# Altium PCB PCB2.PcbDoc
Units mm, origin at the board's own origin, x right, y up, seen from the top; angles counter-clockwise.
Board outline 74.55 x 54.36 mm, 4 copper layers (L-TOP, L-GND, L-Signal, L-BOT), stack 1.095 mm thick; 51 components, 37 nets, 176 pads, 102 vias.
Unrouted connection lines stored in the file: 1.
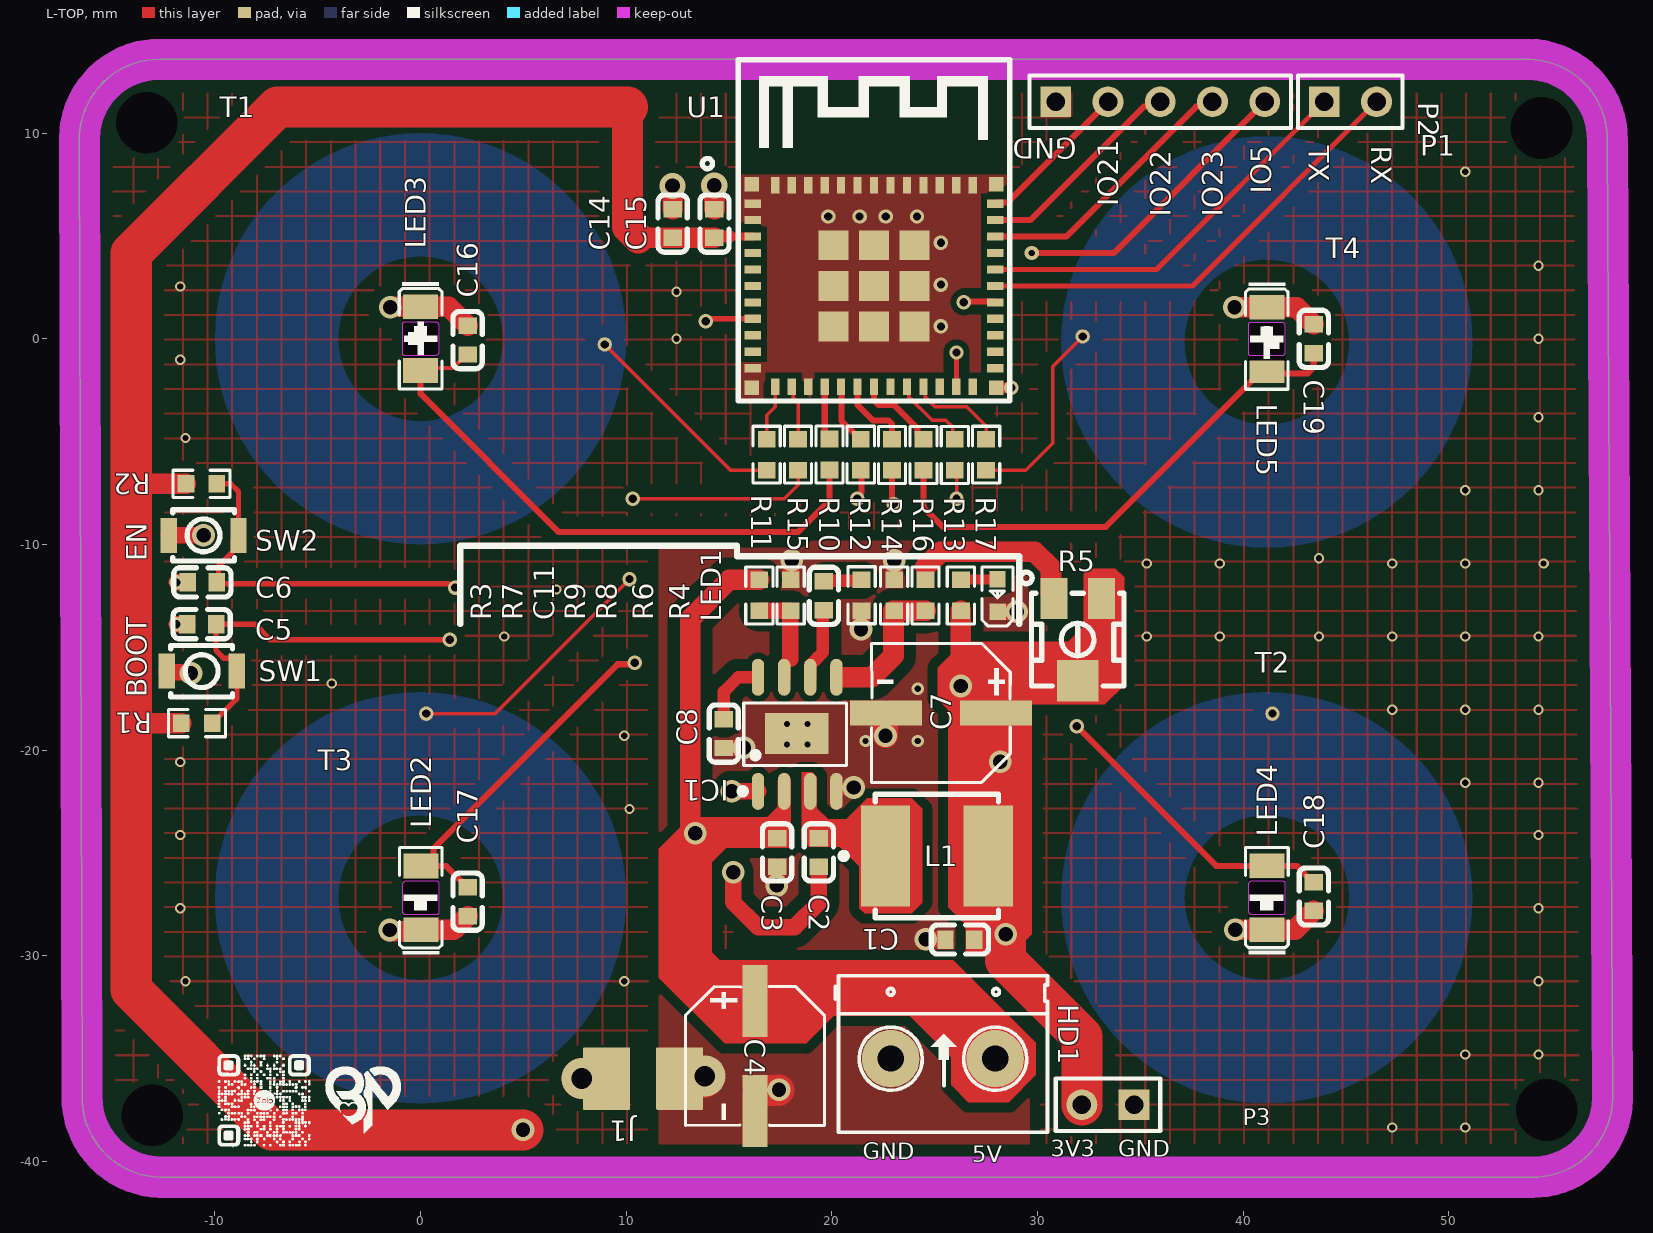
[diagram p0: L-TOP view]
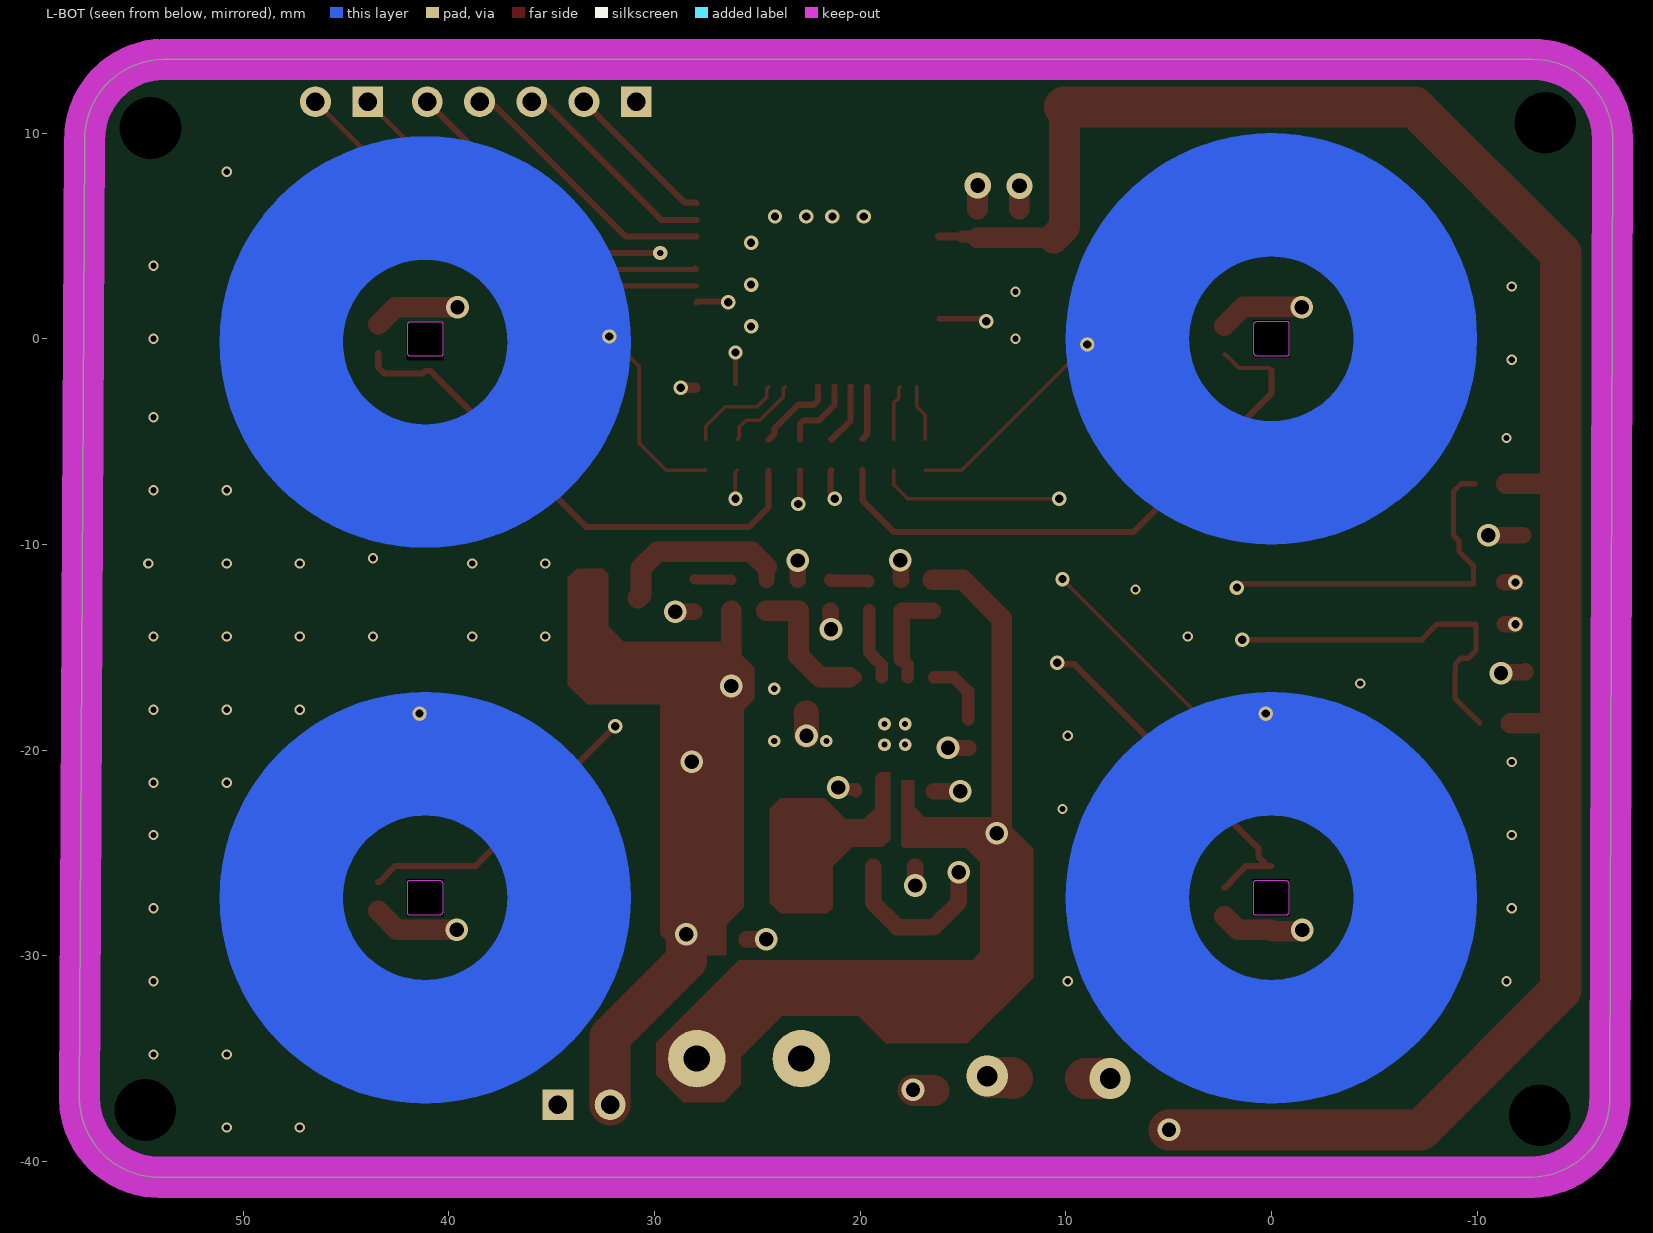
[diagram p1: L-BOT view, seen from below]
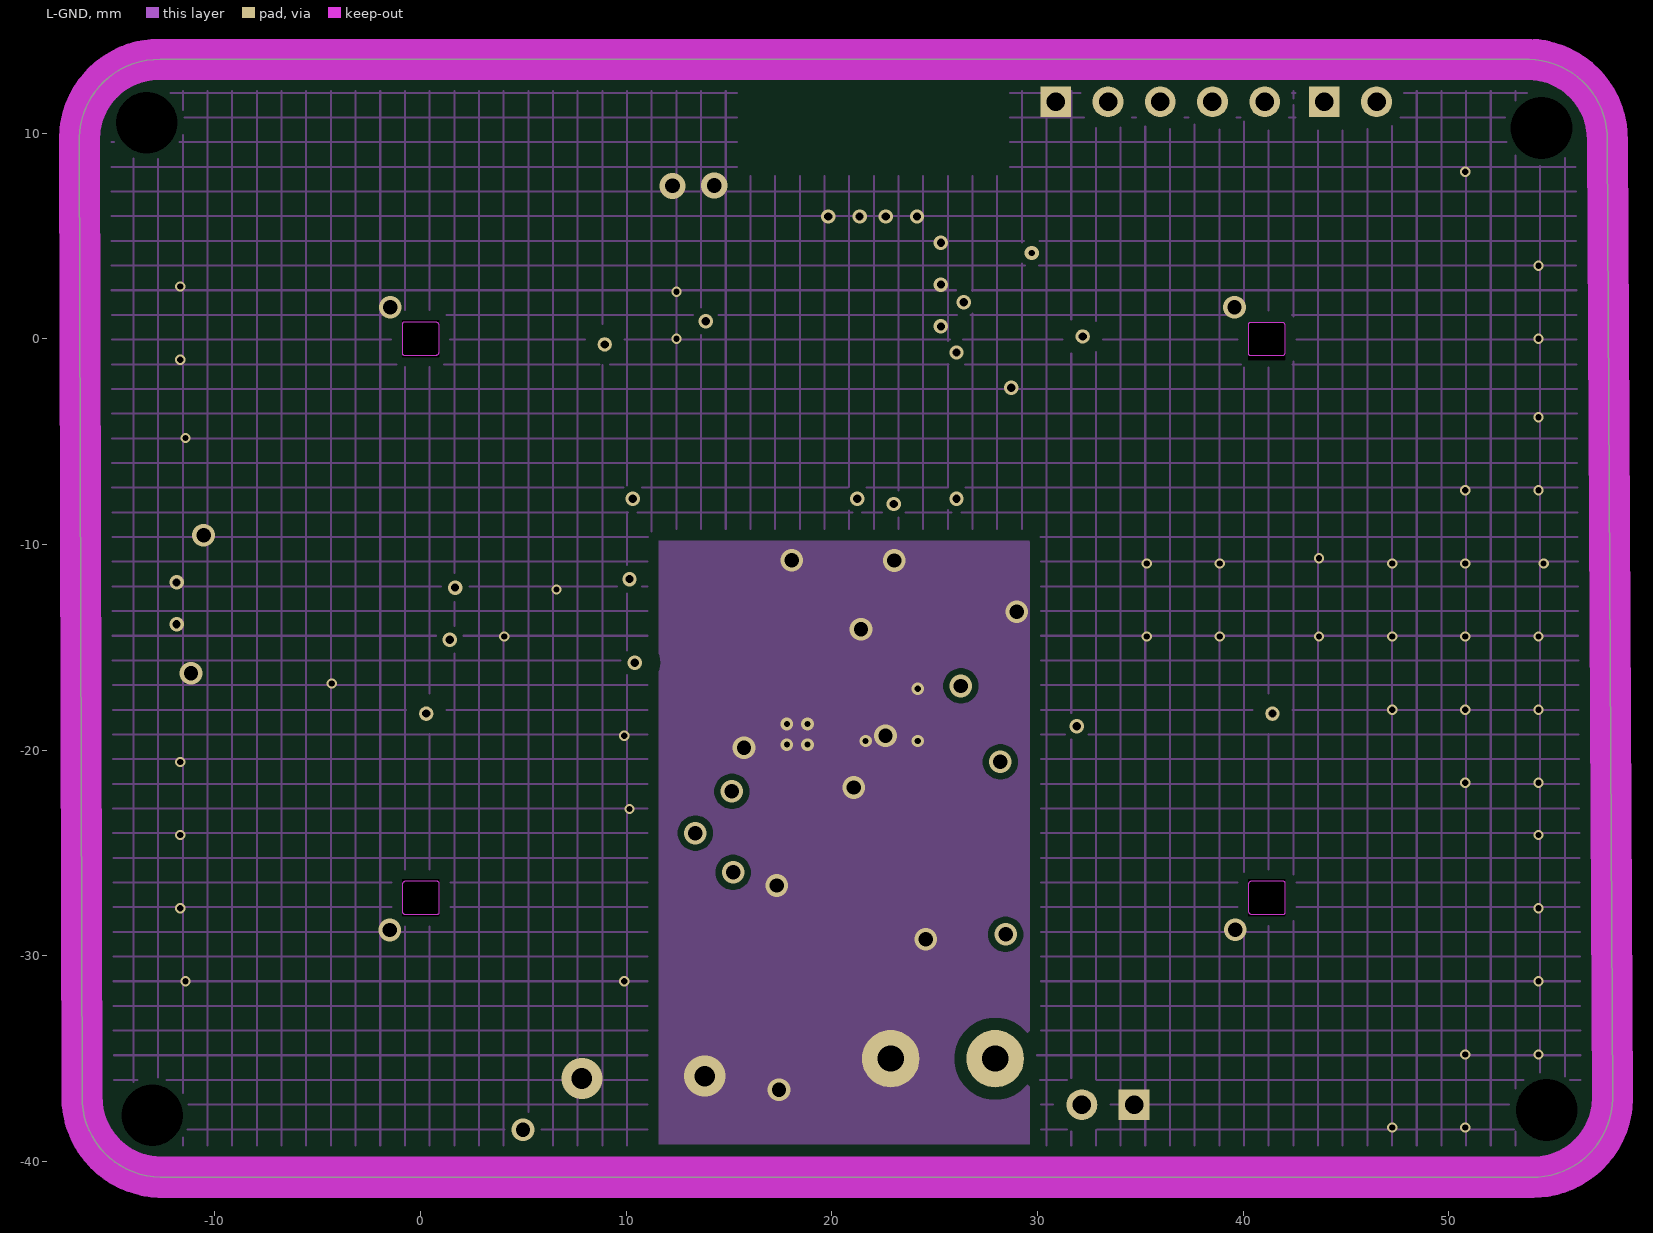
[diagram p2: L-GND]
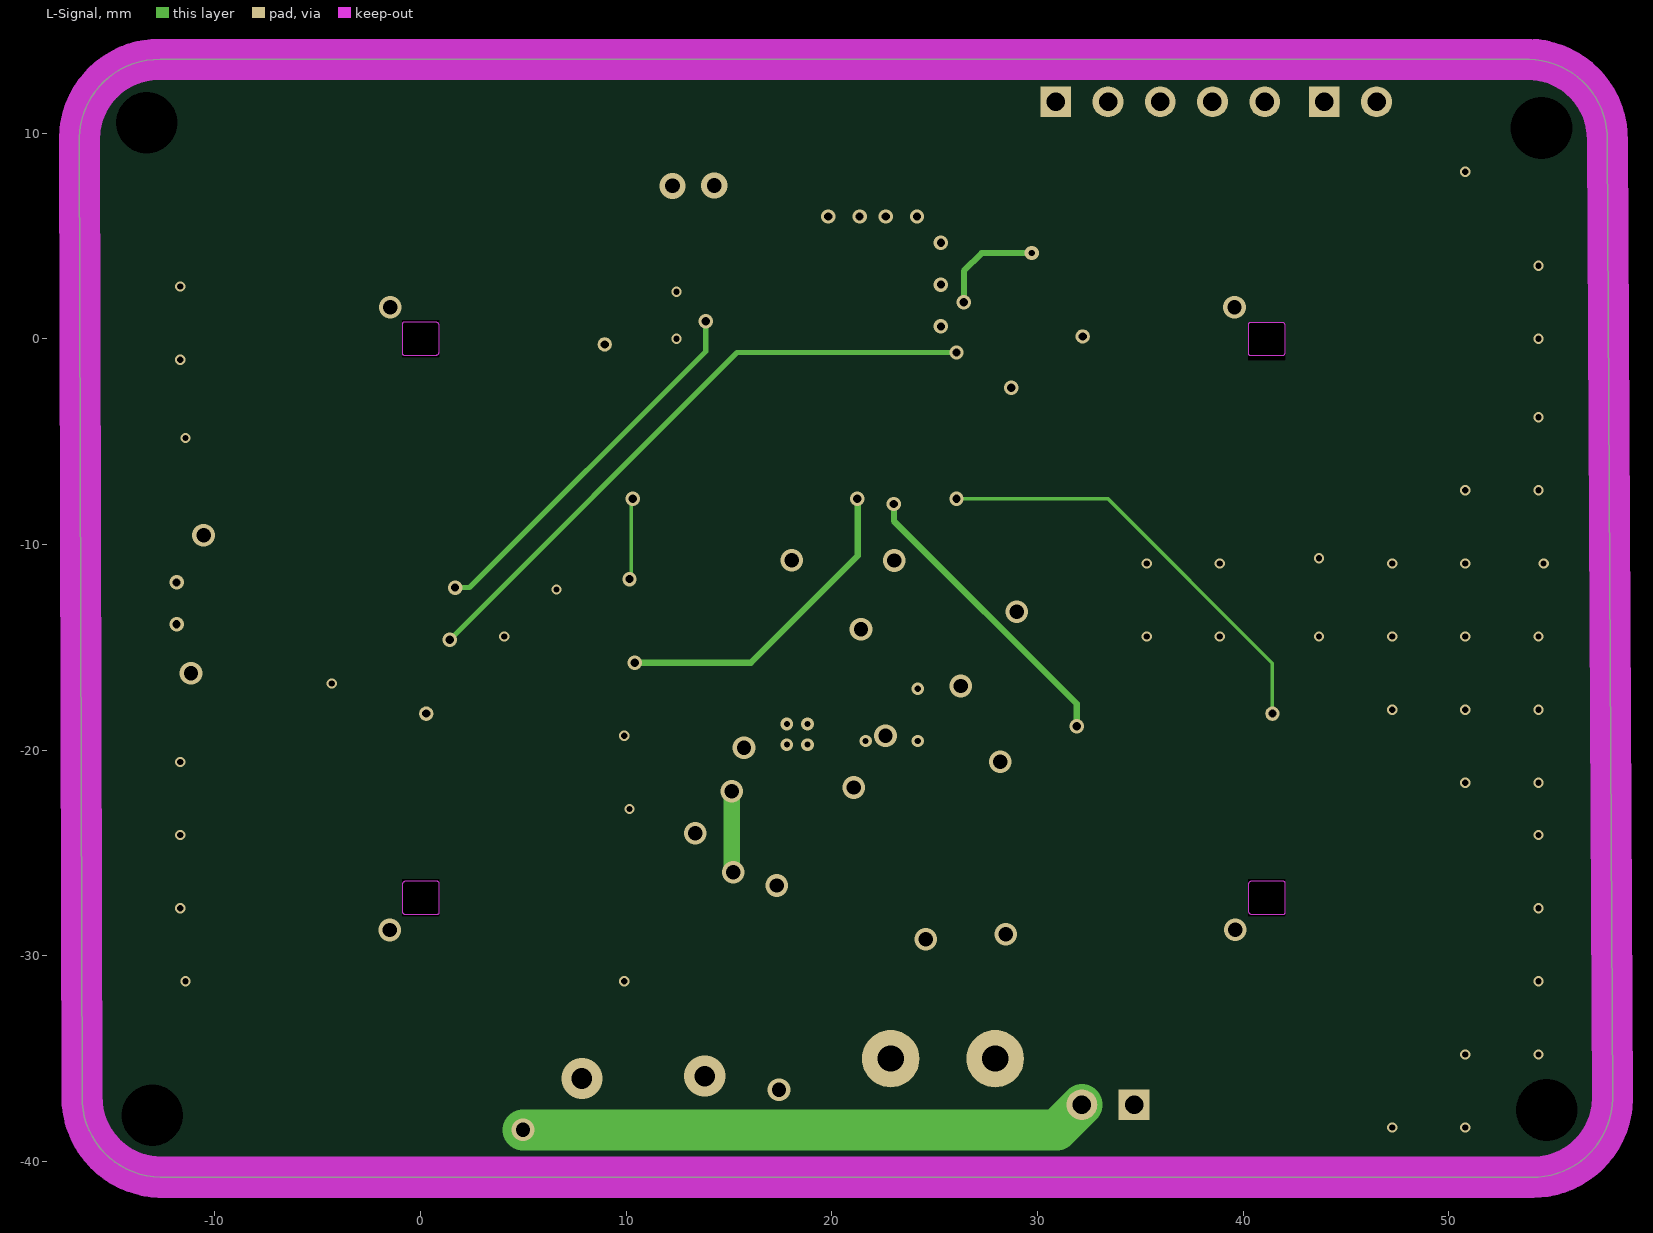
[diagram p3: L-Signal]
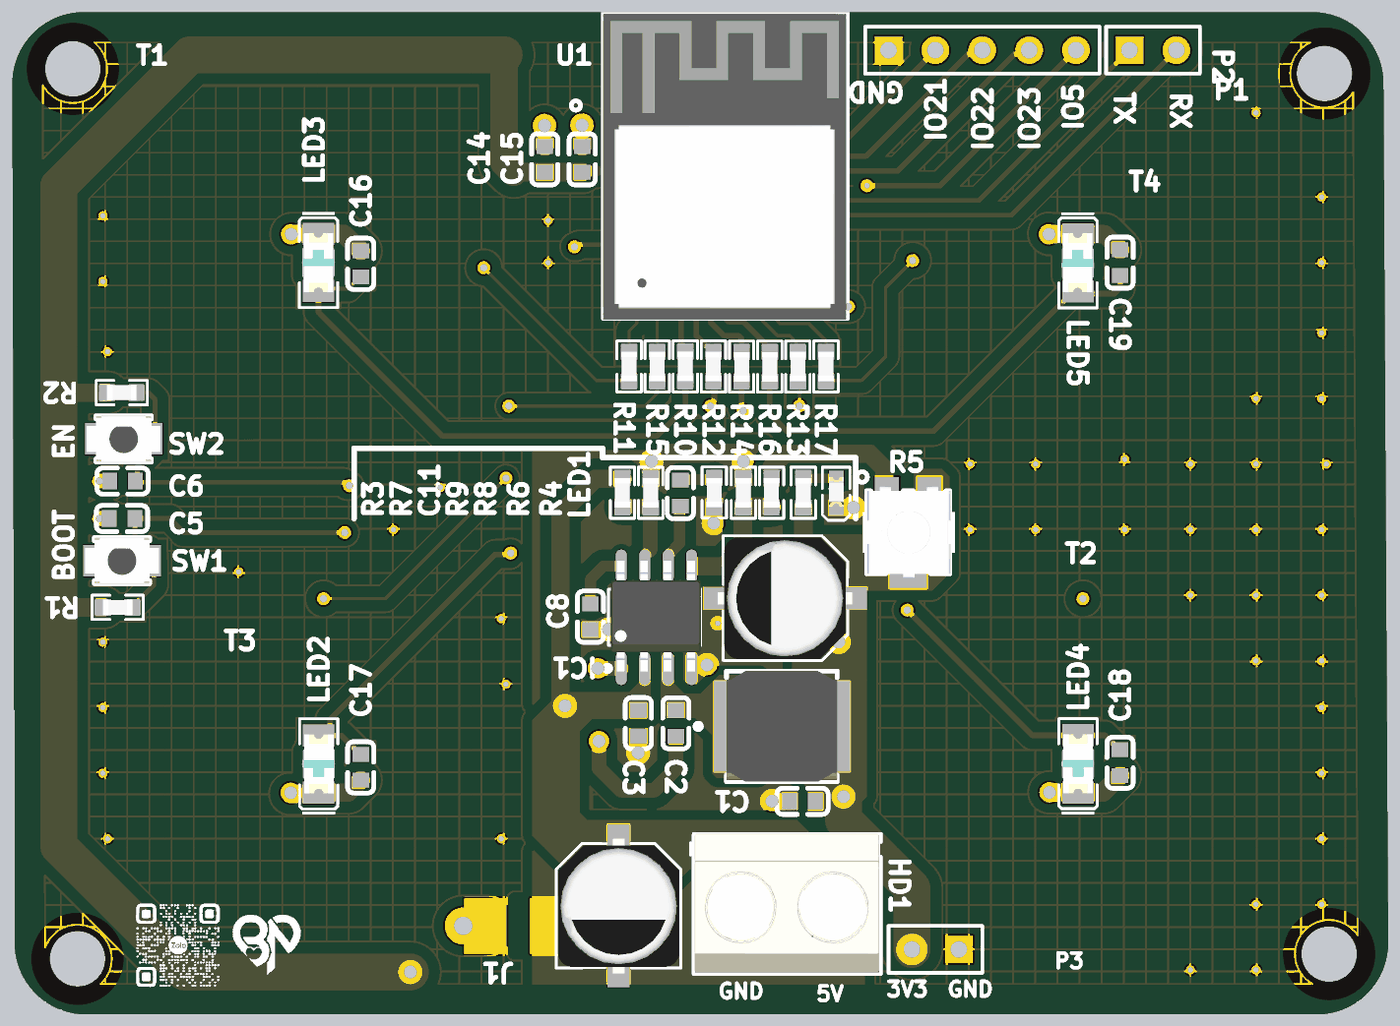
[diagram p4: 3D render of the assembled board from above, using the file's embedded part models]

## Layer stack, top to bottom
Top Solder: solder mask 0.0102, Solder Resist, Dk 3.5
L-TOP: signal copper 0.035
Dielectric 1: core 0.2286, Core-027, Dk 4.5
L-GND: signal copper 0.035
Dielectric 3: prepreg 0.2184, PP-023, Dk 4.5
L-Signal: signal copper 0.035
Dielectric 2: core 0.508, Core-036, Dk 4.6
L-BOT: signal copper 0.035
Bottom Solder: solder mask 0.0102, Solder Resist, Dk 3.5

## Board outline
-16.462,-36.83 -16.589,9.779 cw(c-12.716,9.715) -12.652,13.589 53.896,13.589 cw(c53.832,9.715) 57.706,9.652 57.96,-36.957 cw(c54.086,-36.894) 54.023,-40.767 -12.652,-40.767 cw(c-12.589,-36.894)

## Design rules (kind name [scope] priority, off if disabled: settings)
Clearance [All] p1: gap=0.3 ignorepadtopadclearanceinfootprint=TRUE except(0.5: Fill-Fill Fill-Poly Fill-Region Poly-Poly Poly-Region Region-Region; 0.6: Arc-Fill Arc-Poly Arc-Region Track-Fill Track-Poly Track-Region THPad-Fill THPad-Poly THPad-Region)
PolygonConnect PolygonConnect_1 [All] p1: connectstyle=Direct reliefconductorwidth=0.254 reliefentries=4 polygonreliefangle="90 Angle" airgapwidth=0.254
PolygonConnect [All] p2: connectstyle=Relief reliefconductorwidth=1 reliefentries=4 polygonreliefangle="90 Angle" airgapwidth=0.5
RoutingVias RoutingVias_Power [All] p1: holewidth=0.7 width=1.1 viastyle="Through Hole" minholewidth=0.7 minwidth=1.1 maxholewidth=0.7 maxwidth=1.1
RoutingVias RoutingVias_Signal [All] p2: holewidth=0.4 width=0.7 viastyle="Through Hole" minholewidth=0.4 minwidth=0.7 maxholewidth=0.4 maxwidth=0.7
SolderMaskExpansion [All] p1: expansion=0.102 istentingtop=FALSE
SupplyNets "Schematic Supply Nets_5" [InNet('PGND')] p1: voltage=0.000
SupplyNets "Schematic Supply Nets_4" [InNet('5V')] p2: voltage=0.000
SupplyNets "Schematic Supply Nets_1" [InNet('GND')] p3: voltage=0.000
SupplyNets "Schematic Supply Nets" [InNet('3V3')] p4: voltage=0.000
Width Width_Power [InNetClass('Power')] p1: maxlimit=2 minlimit=0.1 preferedwidth=1.5
Width Width_Signal [All] p2: maxlimit=1.5 minlimit=0.1 preferedwidth=0.3
30 further rules are at their usual default settings.

## Components (designator, comment, footprint, x,y, rotation, side; value= is the part's Value field where it differs from the comment)
C1 "22uF" C0603 26.224,-29.21 r0 top
C2 "100nF" C0603 19.365,-24.975 r270 top
C3 "10uF" C0603 17.333,-24.975 r90 top
C4 "220uF" CAP-SMD_BD6.3-L6.6-W6.6-FD 16.257,-34.874 r270 top
C5 "100nF" C0603 -10.646,-13.875 r180 top
C6 "100nF" C0603 -10.616,-11.843 r180 top
C7 "10uF" CAP-SMD_BD6.3-L6.6-W6.6-FD 25.298,-18.193 r180 top
C8 "100nF" C0603 14.741,-19.197 r90 top
C11 "6.8uF" C0603 19.61,-12.495 r270 top
C14 "22uF" C0603 12.259,5.605 r270 top
C15 "100nF" C0603 14.29,5.605 r90 top
C16 "1nF" C0603 2.286,-0.062 r90 top
C17 "1nF" C0603 2.286,-27.37 r270 top
C18 "1nF" C0603 43.434,-27.116 r270 top
C19 "1nF" C0603 43.434,0 r90 top
HD1 "Header 2" HED2 22.86,-35.004 r0 top
IC1 "MP1484" SOP-8_L4.9-W3.9-P1.27-LS6.0-BL-EP3.1 18.214,-19.23 r0 top
J1 "2 way net tie junction" 2way_HP 10.82,-35.973 r0 top net-tie
L1 "10uH" IND-SMD_L6.0-W6.0_VLS6045EX-2R0N 22.606,-25.146 r0 top
LED1 "XL-1608SURC-06" LED0603-RD_RED 28.05,-12.529 r90 top
LED2 "LTST-C250KFKT" LED1206_LTST-C230KRKT 0.01,-27.293 r90 top
LED3 "LTST-C250KFKT" LED1206_LTST-C230KRKT 0.001,0.115 r270 top
LED4 "LTST-C250KFKT" LED1206_LTST-C230KRKT 41.151,-27.287 r90 top
LED5 "LTST-C250KFKT" LED1206_LTST-C230KRKT 41.148,0.099 r270 top
P1 "Header 5" HDR1X5 30.886,11.525 r0 top
P2 "Header 2" HDR1X2 43.942,11.525 r0 top
P3 "Header 2" HDR1X2 34.696,-37.243 r180 top
R1 "10kΩ" R0603 -10.878,-18.692 r180 top
R2 "10kΩ" R0603 -10.656,-7.05 r180 top
R3 "50kΩ" R0603 16.471,-12.476 r90 top
R4 "50Ω" R0603 26.271,-12.476 r270 top
R5 "1kΩ" RES-ADJ-SMD_3P-L4.5-W4.5-P2.30-BL-FS 31.954,-14.625 r180 top
R6 "26.1kΩ" R0603 24.551,-12.476 r90 top
R7 "100kΩ" R0603 17.995,-12.476 r270 top
R8 "10kΩ" R0603 23.027,-12.476 r270 top
R9 "6.8kΩ" R0603 21.444,-12.471 r90 top
R10 "100Ω" R0603 19.879,-5.625 r270 top
R11 "1kΩ" R0603 16.831,-5.633 r90 top
R12 "100Ω" R0603 21.403,-5.633 r270 top
R13 "1kΩ" R0603 25.975,-5.642 r90 top
R14 "100Ω" R0603 22.927,-5.642 r270 top
R15 "1kΩ" R0603 18.355,-5.633 r90 top
R16 "100Ω" R0603 24.451,-5.642 r270 top
R17 "1kΩ" R0603 27.499,-5.633 r90 top
SW1 "B3U-1000P" KEY-SMD_B3U-1000PM -10.646,-16.161 r0 top
SW2 "B3U-1000P" KEY-SMD_B3U-1000PM -10.554,-9.557 r0 top
T1 "TouchPad" TouchPad 0,0 r0 top
T2 "TouchPad" TouchPad 41.148,-27.178 r90 top
T3 "TouchPad" TouchPad 0,-27.178 r90 top
T4 "TouchPad" TouchPad 41.148,-0.159 r180 top
U1 "ESP32-PICO-MINI-02-N8R2" BULETM-SMD_ESP32-PICO-MINI-02-N8R2 22.048,2.573 r0 top

## Footprints (in the part's own frame and the unit in brackets; to place one, negate y for a bottom-side part, rotate by r counter-clockwise, add the part's x,y. Pads: shape width x height; smd on the part's side, far side on the other; paste and mask are expansions set on the pad)
2way_HP [mil] "2 way high power power net tie junction"
  rrect5% 90x120 smd paste-100: 1(-70,0) 2(70,0)
BULETM-SMD_ESP32-PICO-MINI-02-N8R2 [mm] "BULETM-SMD_ESP32-PICO-MINI-02-N8R2"
  rect 0.8x0.4 smd paste+0 mask+0.05: 1(-5.9,4) 2(-5.9,3.2) 3(-5.9,2.4) 4(-5.9,1.6) 5(-5.9,0.8) 6(-5.9,0) 7(-5.9,-0.8) 8(-5.9,-1.6) 9(-5.9,-2.4) 10(-5.9,-3.2) 11(-5.9,-4) 25(5.9,-4) 26(5.9,-3.2) 27(5.9,-2.4) 28(5.9,-1.6) 29(5.9,-0.8) 30(5.9,0) 31(5.9,0.8) 32(5.9,1.6) 33(5.9,2.4) 34(5.9,3.2) 35(5.9,4)
  rect 0.4x0.8 smd paste+0 mask+0.05: 12(-4.8,-4.9) 13(-4,-4.9) 14(-3.2,-4.9) 15(-2.4,-4.9) 16(-1.6,-4.9) 17(-0.8,-4.9) 18(0,-4.9) 19(0.8,-4.9) 20(1.6,-4.9) 21(2.4,-4.9) 22(3.2,-4.9) 23(4,-4.9) 24(4.8,-4.9) 36(4.8,4.9) 37(4,4.9) 38(3.2,4.9) 39(2.4,4.9) 40(1.6,4.9) 41(0.8,4.9) 42(0,4.9) 43(-0.8,4.9) 44(-1.6,4.9) 45(-2.4,4.9) 46(-3.2,4.9) 47(-4,4.9) 48(-4.8,4.9)
  rect 1.45x1.45 smd paste+0 mask+0.05: 49(-1.975,-1.975) 49(-1.975,0) 49(-1.975,1.975) 49(0,-1.975) 49(0,0) 49(0,1.975) 49(1.975,-1.975) 49(1.975,0) 49(1.975,1.975)
  rect 0.7x0.7 smd paste+0 mask+0.05: 50(5.95,4.95) 51(5.95,-4.95) 52(-5.95,-4.95) 53(-5.95,4.95)
  silkscreen extent -8.35,-5.6 6.6,11, body extent -6.64,-5.67 6.56,10.93, height 2.55
C0603 [mm] "cap 0603"
  rect 0.8x0.9 smd paste+0 mask+0.051: 1(-0.7,0) 2(0.7,0)
  silkscreen extent -1.39,-0.71 1.39,0.71, body extent -0.81,-0.4 0.79,0.4, height 0.8
CAP-SMD_BD6.3-L6.6-W6.6-FD [mm] "CAP ALUM 220uF ±20% 10V SMD"
  rect 3.5x1.2 smd paste+0 mask+0.051: 1(-2.67,0) 2(2.67,0)
  silkscreen extent -3.38,-3.38 3.38,3.38, body extent -3.63,-3.29 3.67,3.31, height 5.8
HDR1X2 [mm] "Connector; Header; 2 Position"
  rect 1.5x1.5 hole 0.9: 1(0,0)
  round 1.5 hole 0.9: 2(2.54,0)
  silkscreen extent -1.27,-1.27 3.81,1.27, body extent -1.27,-1.27 3.81,1.27, height 7
HDR1X5 [mm] "Connector; Header; 5 Position"
  rect 1.5x1.5 hole 0.9: 1(0,0)
  round 1.5 hole 0.9: 2(2.54,0) 3(5.08,0) 4(7.62,0) 5(10.16,0)
  silkscreen extent -1.27,-1.27 11.43,1.27, body extent -1.27,-1.27 11.43,1.27, height 7
HED2 [mil] "Header 2, 2 pin, hight 300mil, Pin to Pin 200, Colour Green"
  round 110 hole 50: 1(0,0) 2(200,0)
  silkscreen extent -106,-141 300,159, body extent -98,-136 296,159, height 394
IND-SMD_L6.0-W6.0_VLS6045EX-2R0N [mm]
  rect 2.4x4.9 smd paste+0 mask+0.051: 1(0,0) 2(5,0)
  silkscreen extent -2.18,-3 5.5,3, body extent -0.5,-3 5.5,3, height 4.5
KEY-SMD_B3U-1000PM [mm]
  rect 0.8x1.7 smd paste+0 mask+0.051: 1(-1.7,0) 2(1.7,0)
  silkscreen extent -1.5,-1.25 1.5,1.25, body extent -2,-1.25 2,1.25, height 1.75
LED0603-RD_RED [mm] "LED RED"
  rect 0.8x0.8 smd paste+0 mask+0.051: 1(-0.75,-0.009) 2(0.849,-0.002)
  silkscreen extent -1.44,-0.75 1.44,0.75, body extent -0.7,-0.4 0.9,0.4, height 0.7
LED1206_LTST-C230KRKT [mm]
  rect 1.2x1.7 smd paste+0 mask+0.05: 1(1.658,0) 2(-1.442,0)
  Keep-Out Layer board cut-out: -0.617,-0.875 -0.655,-0.867 -0.688,-0.846 -0.71,-0.813 -0.717,-0.775 -0.717,-0.775 -0.717,0.725 -0.706,0.782 -0.673,0.831 -0.625,0.864 -0.567,0.875 -0.567,0.875 0.783,0.875 0.84,0.864 0.889,0.831 0.921,0.782 0.933,0.725 0.933,0.725 0.933,-0.775 0.925,-0.813 0.904,-0.846 0.871,-0.867 0.833,-0.875 0.833,-0.875
  silkscreen extent -2.63,-1.04 2.55,1.04, body extent -1.49,-0.81 1.71,0.79, height 0.28
R0603 [mm] "Resister pakage 0603"
  rect 0.806x0.864 smd paste-100 mask+0.051: 1(-0.753,0) 2(0.753,0)
  silkscreen extent -1.39,-0.66 1.39,0.66, body extent -0.8,-0.43 0.8,0.43, height 0.48
RES-ADJ-SMD_3P-L4.5-W4.5-P2.30-BL-FS [mm]
  rect 1.3x2 smd mask+0.1: 1(1.15,-2) 3(-1.15,-2)
  rect 2x2 smd mask+0.1: 2(0,2)
  silkscreen extent -2.25,-3.28 2.78,2.25, body extent -2.54,-2.5 2.46,2.5
SOP-8_L4.9-W3.9-P1.27-LS6.0-BL-EP3.1 [mm] "MP1484"
  oval 0.6x1.8 smd paste+0 mask+0.051: 1(-1.805,-2.773) 2(-0.535,-2.773) 3(0.735,-2.773) 4(2.005,-2.773) 5(2.005,2.773) 6(0.735,2.773) 7(-0.535,2.773) 8(-1.805,2.773)
  rect 3.1x2 smd paste+0 mask+0.051: 9(0.083,0.033)
  silkscreen extent -2.7,-2.92 2.5,1.52, body extent -2.38,-2.94 2.52,3.06, height 1.7
TouchPad [mm]
  round 0.7 hole 0.4: 1(8.953,-0.273)
  rect 0x0 hole 1.79 square unplated mask+0: 3(0,0)
  L-BOT circle w6: c0,0 r7
  silkscreen extent -0.6,-0.78 0.15,0.82

## Part data
C1 C14: library part CL10A226MP8NUNE, "10V 22uF X5R ±20% 0603 Ceramic Capacitors ROHS"
C2 C5 C6 C8 C15: library part CC0603KRX7R9BB104, "50V 100nF X7R ±10% 0603 Ceramic Capacitors ROHS"
C3: library part CL10A106KP8NNNC, "10V 10uF X5R ±10% 0603 Ceramic Capacitors ROHS"
C4: library part RVT220UF10V67RV0037, "220uF 10V ±20% 69mA@120Hz SMD,D6.3xL5.4mm Aluminum Electrolytic Capacitors ROHS"
C7: library part RST10UF50V016, "10uF 50V 24mA@120Hz ±20% SMD,D5xL5.4mm Aluminum Electrolytic Capacitors ROHS"
C11: library part C1608X5R1A685KT000E, "10V 6.8uF X5R ±10% 0603 Ceramic Capacitors ROHS"
C16 C17 C18 C19: library part CL10B102KB8NNNC, "50V 1nF X7R ±10% 0603 Ceramic Capacitors ROHS"
HD1: library part Hed2, "Header 2 (Green)"
IC1: "The MP1484 is a monolithic synchronous buck  / regulator."
J1: library part 2way, ComponentLink1Description=Source, ComponentLink1URL=http://www.edatools.cz/addons, FootprintNote="LP=12mil, MP=40mil, HP=120mil"
L1: library part VLS6045EX-100M, "3.4A 10uH ±20% 3.9A 47mΩ SMD,6x6mm Fixed Inductors ROHS"
LED2 LED3 LED4 LED5: "20mA Orange 1.6V~2.4V 62.5mW 1205 LED Indication - Discrete ROHS"
P1: "Header, 5-Pin", LatestRevisionDate=17-Jul-2002, LatestRevisionNote="Re-released for DXP Platform.", Publisher="Altium Limited", System=Connector
P2 P3: "Header, 2-Pin", LatestRevisionDate=17-Jul-2002, LatestRevisionNote="Re-released for DXP Platform.", Publisher="Altium Limited"
R1 R2 R8: library part RC0603FR-0710KL, "100mW 10kΩ 75V ±100ppm/℃ Thick Film Resistor ±1% 0603 Chip Resistor - Surface Mount ROHS"
R3: library part RT0603BRD0750KL, "50kΩ 100mW 75V ±25ppm/℃ Thin Film Resistor ±0.1% 0603 Chip Resistor - Surface Mount ROHS"
R4: library part RT0603BRE0750RL, "100mW 50Ω 75V ±50ppm/℃ Thin Film Resistor ±0.1% 0603 Chip Resistor - Surface Mount ROHS"
R5: library part 3314J-1-102E, "±20% ±100ppm/℃ 250mW 1kΩ SMD,4.5x4.5mm Trimmer Potentiometers ROHS"
R6: library part 0603WAF2612T5E, "100mW 26.1kΩ 75V ±100ppm/℃ Thick Film Resistor ±1% 0603 Chip Resistor - Surface Mount ROHS"
R7: library part RC0603FR-07100KL, "100mW 100kΩ 75V ±100ppm/℃ Thick Film Resistor ±1% 0603 Chip Resistor - Surface Mount ROHS"
R9: library part FRC0603F6801TS, "6.8kΩ 100mW 75V ±100ppm/℃ Thick Film Resistor ±1% 0603 Chip Resistor - Surface Mount ROHS"
R10 R12 R14 R16: library part RC0603FR-07100RL, "100mW 100Ω 75V ±100ppm/℃ Thick Film Resistor ±1% 0603 Chip Resistor - Surface Mount ROHS"
R11 R13 R15 R17: library part "RMC 0603 1K J N", "100mW 1kΩ 50V ±100ppm/℃ Thick Film Resistor ±5% 0603 Chip Resistor - Surface Mount ROHS"
SW1 SW2: "12V 2.5mm Round Button 3mm SPST 50mA SMD,3x2.5mm Tactile Switches ROHS"
T1 T2 T3 T4: "pad cam ung dien dung"
U1: "ESP32-PICO-MINI-02 and ESP32-PICO-MINI-02U are two general-purpose Wi-Fi + Bluetooth + Bluetooth LEMCU modules"

## Free pads (board coordinates)
  round 0 hole 3 unplated mask+2.5: 4(-13.31,10.509) 4(-13.056,-37.751) 4(54.508,10.255) 4(54.762,-37.497)

## Via types
v1: diameter 0.5, hole 0.3, L-TOP to L-BOT, 45 vias
v2: diameter 1.1, hole 0.7, L-TOP to L-BOT, 23 vias
v3: diameter 0.7, hole 0.4, L-TOP to L-BOT, 22 vias
v4: diameter 0.61, hole 0.305, L-TOP to L-BOT, 4 vias
v5: diameter 0.6, hole 0.3, L-TOP to L-BOT, 3 vias
v6: diameter 2, hole 1, L-TOP to L-BOT, 2 vias
v7: diameter 1.27, hole 0.711, L-TOP to L-BOT, 2 vias
v8: diameter 0.7, hole 0.3, L-TOP to L-BOT, 1 vias

## Nets (pads, with @x,y where several pads share a name; then routed paths per layer and width w, separated by ;. In a path a pad name is that pad's centre, name@x,y a point inside that pad or via, vN(x,y) a via of type N, cw(c..) or ccw(c..) an arc to the next point about the centre after c; other vN are vias at no path point)
3V3: C1.2 C7.1 C14.2 C15.1 L1.2 P3.2 R1.2 R2.2 R4.2 R5.2 R5.3 U1.3 | length 143.5
  L-TOP w0.4: 15.048,4.973 U1.3
  L-TOP w0.6: C15.1 14.358,4.973 15.048,4.973
  L-TOP w1: -14.292,-7.096 -14.246,-7.05 -14.072,-7.05 R2.2 ; -14.116,-18.596 -14.072,-18.641 -14.02,-18.692 R1.2 ; 10.583,4.905 C15.1 ; v2(26.271,-16.88) R4.2
  L-TOP w1.5: 10.058,11.271 10.058,5.429 10.583,4.905
  L-TOP w2: -14.072,-18.641 -14.072,-31.655 -7.259,-38.467 v2(4.978,-38.467) ; -14.072,-18.596 -14.072,-7.05 -14.072,4.159 -6.96,11.271 10.058,11.271 ; v2(28.448,-28.956) 28.448,-30.226 32.156,-33.934 P3.2
  L-Signal w2: v2(4.978,-38.467) 30.932,-38.467 P3.2
  other v2: 28.194,-20.574
5V: C3.2 C4.1 HD1.2 IC1.2 R3.2 | length 17.1
  L-TOP w0.6: C3.2 17.383,-24.275 17.678,-23.98 IC1.2
  L-TOP w1: v2(13.36,-24.035) 13.36,-24.008 13.106,-23.754 13.106,-13.621 15.005,-11.722 R3.2
Boot: C5.1 R1.1 SW1.2 U1.23 | length 49.5
  L-TOP w0.254: R1.1 -10.125,-18.663 -9.849,-18.387 -9.82,-18.387 -8.927,-17.494 SW1.2@-8.927,-16.161 ; SW1.2 -8.945,-15.801 -9.218,-15.528 -9.578,-15.528 -9.946,-15.161 C5.1 -8.051,-13.875 -7.34,-14.586 ; -7.34,-14.637 v3(1.422,-14.637) ; U1.23@26.06,-2.164 v3(26.06,-0.667)
  L-Signal w0.254: v3(1.422,-14.637) 15.392,-0.667 v3(26.06,-0.667)
BS: C2.2 IC1.1 | length 13.6
  L-TOP w0.8: v2(15.138,-22.003) IC1.1 ; v2(15.196,-25.947) 15.196,-27.394 16.408,-28.607 18.186,-28.607 19.365,-27.428 C2.2
  L-Signal w0.8: v2(15.138,-22.003) 15.138,-25.89 v2(15.196,-25.947)
COMP: C11.2 IC1.6 | length 3.5
  L-TOP w0.6: IC1.6 18.948,-15.858 19.318,-15.488 19.318,-15.485 19.56,-15.243 C11.2@19.56,-13.195
EN: C6.1 R2.1 SW2.2 U1.8 | length 38.3
  L-TOP w0.254: R2.1 -9.228,-7.05 -8.854,-7.425 SW2.2 -9.127,-9.83 -9.127,-10.335 -9.834,-11.042 C6.1@-9.834,-11.76 ; C6.1@-9.849,-11.907 1.366,-11.907 1.556,-12.097 v3(1.676,-12.097) ; v3(13.868,0.857) 13.989,0.857 14.104,0.973 U1.8
  L-Signal w0.254: v3(1.676,-12.097) 2.381,-12.097 13.868,-0.61 v3(13.868,0.857)
EN1: IC1.7 R3.1 R7.2 | length 4.9
  L-TOP w0.6: IC1.7 17.678,-15.858 17.967,-15.569 ; R7.2@17.967,-13.229 R7.2
  L-TOP w0.8: R3.1 17.678,-13.229 R7.2@17.967,-13.229 ; 17.967,-15.569 R7.2@17.967,-13.232
FB: IC1.5 R6.1 R8.2 | length 7
  L-TOP w0.6: IC1.5 20.218,-16.466 20.536,-16.466
  L-TOP w1: 20.536,-16.466 21.945,-16.466 22.995,-15.416 22.995,-13.232 22.999,-13.229 R6.1
GND: C5.2 C6.2 C14.1 C15.2 C16.2 C17.2 C18.2 C19.2 J1.1 LED2.2 LED3.2 LED4.2 LED5.2 P1.1 P3.1 SW1.1 SW2.1 U1.1 U1.2 U1.11 U1.14 U1.36 U1.37 U1.38 U1.39 U1.40 U1.41 U1.42 U1.43 U1.44 U1.45 U1.46 U1.47 U1.48 U1.49 U1.50 U1.51 U1.52 U1.53 | length 24.9
  L-TOP w0.5: U1.51 28.002,-2.381 28.715,-2.381 v3(28.718,-2.384)
  L-TOP w0.8: SW1.1 -12.346,-16.214 -11.215,-16.214 v2(-11.162,-16.267) ; SW2.1 v2(-10.554,-9.557) ; v3(-11.864,-13.875) C5.2 ; v3(-11.864,-11.843) C6.2
  L-TOP w1: v2@-1.525,-28.804 -0.058,-28.804 LED2.2 1.62,-28.735 C17.2 ; v2@-1.469,1.548 -1.459,1.558 LED3.2 1.366,1.558 C16.2 ; v7(12.251,7.436) 12.259,7.428 C14.1 ; v7(14.277,7.454) 14.291,7.441 C15.2 ; v2@39.591,1.576 39.624,1.543 41.146,1.543 LED5.2 42.593,1.541 C19.2 ; v2@39.601,-28.721 39.61,-28.73 LED4.2 42.52,-28.73 C18.2
  L-TOP w2: v6(7.844,-35.967) 7.849,-35.973 J1.1
  other v1: 47.244,-38.354 50.8,-38.354 50.8,-34.798 54.356,-34.798 -11.43,-31.242 9.906,-31.242 54.356,-31.242 -11.684,-27.686 54.356,-27.686 -11.684,-24.13 54.356,-24.13 10.16,-22.86 50.8,-21.59 54.356,-21.59 -11.684,-20.574 9.906,-19.304 47.244,-18.034 50.8,-18.034 54.356,-18.034 -4.318,-16.764 4.064,-14.478 35.306,-14.478 38.862,-14.478 43.688,-14.478 47.244,-14.478 50.8,-14.478 54.356,-14.478 6.604,-12.192 35.306,-10.922 38.862,-10.922 47.244,-10.922 50.8,-10.922 54.61,-10.922 43.688,-10.668 50.8,-7.366 54.356,-7.366 -11.43,-4.826 54.356,-3.81 -11.684,-1.016 12.446,0 54.356,0 12.446,2.286 -11.684,2.54 54.356,3.556 50.8,8.128
  other v2: -1.503,-28.748 39.612,-28.727 -1.477,1.54 39.577,1.541
  other v3: 25.298,0.603 25.298,2.635 25.298,4.667 19.821,5.949 21.345,5.949 22.615,5.949 24.139,5.949
IO5: P1.5 U1.29 | length 21.1
  L-TOP w0.3: v3(26.416,1.778) 26.461,1.823 27.899,1.823 U1.29 ; v8(29.718,4.173) 33.694,4.173 P1.5
  L-Signal w0.3: v3(26.416,1.778) 26.416,3.302 27.287,4.173 v8(29.718,4.173)
IO14: R16.1 U1.18 | length 4
  L-TOP w0.3: U1.18 22.048,-3.005 22.25,-3.207 23.012,-3.207 24.169,-4.363 24.169,-4.636 24.422,-4.889 R16.1
IO21: P1.2 U1.35 | length 7.5
  L-TOP w0.3: U1.35 27.999,6.623 28.524,6.623 P1.2
IO22: P1.3 U1.34 | length 10.4
  L-TOP w0.3: U1.34 29.649,5.773 35.172,11.296 35.737,11.296 P1.3
IO23: P1.4 U1.33 | length 13.3
  L-TOP w0.3: U1.33 31.389,4.973 37.712,11.296 38.277,11.296 P1.4
IO25: R10.1 U1.15 | length 2.6
  L-TOP w0.3: U1.15 19.649,-4.641 R10.1
IO26: R12.1 U1.16 | length 3
  L-TOP w0.3: U1.16 20.466,-2.345 20.466,-3.972 21.374,-4.88 R12.1
IO27: R14.1 U1.17 | length 3.7
  L-TOP w0.3: U1.17 21.248,-3.221 21.996,-3.969 22.751,-3.969 22.927,-4.144 R14.1
NetC11_1: C11.1 R9.2 | length 1.9
  L-TOP w0.6: C11.1 19.649,-11.756 21.405,-11.756 R9.2
NetC16_1: C16.1 LED3.1 R10.2 | length 28.5
  L-TOP w0.2: LED3.1 0.126,-1.417 1.581,-1.417 2.236,-0.762 C16.1
  L-TOP w0.3: LED3.1 0.001,-2.68 6.719,-9.398 18.345,-9.398 19.879,-7.864 R10.2
NetC17_1: C17.1 LED2.1 R12.2 | length 34.6
  L-TOP w0.3: LED2.1 0.18,-25.635 0.63,-25.185 0.63,-24.77 9.575,-15.825 10.337,-15.825 v3(10.414,-15.748) ; LED2.1@0.131,-25.635 1.251,-25.635 1.986,-26.37 1.986,-26.42 2.236,-26.67 C17.1 ; v3(21.234,-7.779) 21.234,-7.67 21.445,-7.459 21.445,-6.429 R12.2
  L-Signal w0.3: v3(10.414,-15.748) 16.059,-15.748 21.259,-10.548 21.259,-7.803 v3(21.234,-7.779)
NetC18_1: C18.1 LED4.1 R14.2 | length 30.8
  L-TOP w0.3: R14.2 22.927,-7.839 23.012,-7.924 v3(23.012,-8.033) ; v3(31.902,-18.843) 38.689,-25.629 42.597,-25.629 43.384,-26.416 C18.1
  L-Signal w0.3: v3(23.012,-8.033) 23.012,-8.858 31.902,-17.748 v3(31.902,-18.843)
NetC19_1: C19.1 LED5.1 R16.2 | length 25.2
  L-TOP w0.3: R16.2 24.451,-8.195 25.4,-9.144 33.313,-9.144 40.898,-1.559 LED5.1 41.272,-1.683 43.141,-1.683 43.434,-1.39 C19.1
NetLED1_2: LED1.2 R4.1 | length 1.8
  L-TOP w0.5: R4.1 26.292,-11.701 28.03,-11.701 LED1.2
NetR5_1: R5.1 R6.2 | length 8.9
  L-TOP w0.8: R6.2 24.551,-11.09
  L-TOP w1: 24.551,-11.09 25.28,-10.362 29.87,-10.362 30.654,-11.146 30.654,-12.475 R5.1
NetR11_1: R11.1 T1.1 | length 10.4
  L-TOP w0.17: T1.1 15.067,-6.387 R11.1
NetR13_1: R13.1 T2.1 | length 22.5
  L-TOP w0.17: R13.1 26.06,-6.481 v3(26.06,-7.779)
  L-Signal w0.17: v3(26.06,-7.779) 33.426,-7.779 41.421,-15.774 T2.1
NetR15_1: R15.1 T3.1 | length 25.6
  L-TOP w0.17: T3.1 3.619,-18.225 v3(10.16,-11.684) ; v3(10.312,-7.779) 17.678,-7.779 18.355,-7.102 R15.1
  L-Signal w0.17: v3(10.16,-11.684) 10.236,-11.608 10.236,-7.855 v3(10.312,-7.779)
NetR17_1: R17.1 T4.1 | length 9.6
  L-TOP w0.17: R17.1 29.427,-6.387 30.734,-5.08 30.734,-1.346 T4.1
PGND: C1.1 C3.1 C4.2 C7.2 C8.1 HD1.1 IC1.4 IC1.9 J1.2 LED1.1 R7.1 R8.1 R9.1 | length 11.1
  L-TOP w0.6: IC1.4 20.218,-21.91 20.964,-21.91 v2(21.056,-21.818)
  L-TOP w0.8: C8.1 15.709,-19.897 v2(15.724,-19.882) ; v2(17.319,-26.583) 17.326,-26.577 17.326,-25.675 C3.1 ; R7.1 18.018,-11.722 18.021,-11.719 18.021,-10.795 v2(18.046,-10.77) ; v2(21.415,-14.129) 21.429,-14.114 21.429,-13.227 21.433,-13.224 R9.1 ; R8.1 v2@23.028,-10.779 ; v2(24.57,-29.198) 24.576,-29.204 25.524,-29.204 C1.1 ; LED1.1 28.992,-13.279 v2(28.993,-13.278)
  L-TOP w1.2: v2(22.606,-19.304) 22.606,-18.192 C7.2
  L-TOP w1.5: C4.2@16.406,-36.544 17.402,-36.544 v2(17.426,-36.52)
  L-TOP w2: J1.2 12.658,-35.913 13.76,-35.913 v6(13.819,-35.854)
  other v2: 23.028,-10.779
  other v4: 17.813,-19.73 18.813,-19.73 17.813,-18.73 18.813,-18.73
  other v5: 21.638,-19.558 24.178,-19.558 24.178,-17.018
RX: P2.2 U1.30 | length 22.2
  L-TOP w0.254: U1.30 37.529,2.573 P2.2
SS: C8.2 IC1.8 | length 3.3
  L-TOP w0.6: C8.2 14.741,-17.165 15.448,-16.458 IC1.8
SW: C2.1 IC1.3 L1.1
touch1: R11.2 U1.12 | length 2.7
  L-TOP w0.17: R11.2 16.831,-3.714 17.249,-3.296 U1.12
touch2: R15.2 U1.13 | length 2.7
  L-TOP w0.17: U1.13 18.118,-2.397 18.118,-2.878 18.355,-3.115 R15.2
touch3: R13.2 U1.20 | length 3.9
  L-TOP w0.17: U1.20 23.748,-2.427 23.748,-2.839 24.87,-3.961 25.544,-3.961 25.886,-4.303 25.886,-4.801 R13.2
touch4: R17.2 U1.21 | length 4.7
  L-TOP w0.17: U1.21 24.548,-2.427 24.548,-2.839 25.012,-3.302 26.552,-3.302 27.499,-4.248 R17.2
TX: P2.1 U1.31 | length 19.5
  L-TOP w0.254: U1.31@28.022,3.446 U1.31 35.789,3.373 P2.1
pads on no net: T1.3 T2.3 T3.3 T4.3 U1.4 U1.5 U1.6 U1.7 U1.9 U1.10 U1.19 U1.22 U1.24 U1.25 U1.26 U1.27 U1.28 U1.32

## Polygon pours and split planes (outlines as drawn)
GND on L-GND "GND_L02_P001" (hatched 90Degree grid 1.2 track 0.1, pour order 1): -16.589,13.682 -16.526,13.619 57.706,13.619 57.706,-40.494 57.413,-40.787 -16.247,-40.787 -16.589,-40.446 -16.589,13.589
PGND on L-GND "PGND_L02_P004" (solid, pour order 4): 11.582,-39.222 11.582,-9.811 29.616,-9.811 29.616,-39.222
GND on L-TOP "GND_L01_P003" (hatched 90Degree grid 1.2 track 0.1, pour order 3): -15.24,12.7 56.388,12.7 57.404,11.684 57.404,-38.862 55.372,-40.894 -13.462,-40.894 -16.51,-37.846 -16.51,11.43
PGND on L-TOP "PGND_L01_P000" (solid, pour order 0): 11.582,-39.222 11.582,-9.811 29.616,-9.811 29.616,-39.222
GND on L-TOP "GND_L01_P002" (solid, pour order 2): 15.392,7.969 28.6,7.969 28.6,-2.979 28.649,-3.027 15.448,-3.027 15.448,7.913

## Keep-outs
Keep-Out Layer:
  the board outline again, w2

## Other copper
L-TOP:
  pour cut-out: 15.448,7.913 15.505,7.969 28.6,7.969 28.6,13.524 28.649,13.573 15.448,13.573
  region net 5V: 14.546,-30.209 25.891,-30.209 29.923,-34.241 29.923,-35.796 28.592,-37.128 26.639,-37.128 25.793,-36.282 25.793,-34.944 23.774,-32.925 20.081,-32.925 18.739,-34.267 18.73,-34.258 14.78,-34.258 11.582,-31.06 11.582,-24.797 13.106,-23.273 16.85,-23.273 17.363,-22.76 17.363,-21.454 17.983,-21.454 17.992,-21.445 17.992,-24.639 17.884,-24.747 14.861,-24.747 14.159,-25.449 14.159,-29.822
  region net SW: 18.542,-21.082 18.542,-24.348 18.89,-24.696 20.378,-24.696 21.336,-25.654 21.336,-27.686 21.59,-27.94 23.876,-27.94 24.384,-27.432 24.384,-22.86 23.876,-22.352 21.725,-22.352 20.709,-23.368 19.812,-23.368 19.269,-22.825 19.269,-21.301 19.05,-21.082
  region net 3V3: 26.504,-29.972 26.504,-28.5 25.654,-27.65 25.654,-18.034 25.146,-17.526 25.146,-16.002 26.416,-14.732 31.496,-14.732 32.258,-13.97 32.258,-11.43 32.512,-11.176 33.782,-11.176 34.205,-11.599 34.205,-16.849 33.274,-17.78 29.718,-17.78 29.718,-28.956 28.702,-29.972
L-GND:
  pour cut-out: 15.448,7.913 15.505,7.969 28.6,7.969 28.6,13.524 28.649,13.573 15.448,13.573
L-Signal:
  pour cut-out: 15.448,7.913 15.505,7.969 28.6,7.969 28.6,13.524 28.649,13.573 15.448,13.573
L-BOT:
  pour cut-out: 15.448,7.913 15.505,7.969 28.6,7.969 28.6,13.524 28.649,13.573 15.448,13.573

## Silkscreen, mask and mechanical layers (free items; w line width, h text height)
Top Overlay:
  drawing of 2242 lines, arcs and shapes, not listed
  text "GND" at 31.902,9.747 h1 r180
  text "TX" at 43.18,9.398 h1 r270
  text "RX" at 46.228,9.398 h1 r270
  text "IO5" at 41.374,7.05 h1 r90
  text "IO21" at 33.934,6.445 h1 r90
  text "IO22" at 36.474,5.937 h1 r90
  text "IO23" at 39.014,5.937 h1 r90
  text "EN" at -13.31,-10.827 h1 r90
  text "BOOT" at -13.31,-17.431 h1 r90
  text "3V3" at 30.632,-39.783 h0.8
  text "GND" at 33.934,-39.783 h0.8
  text "GND" at 21.511,-39.891 h0.8
  text "5V" at 26.822,-40.037 h0.8

## Dimensions
-12.652,-40.767 to -12.652,13.589 on Mechanical 10
-16.589,9.779 to 57.706,9.652 on Mechanical 10